# EAGLE board ToastSchematic (EAGLE 9.2.1)
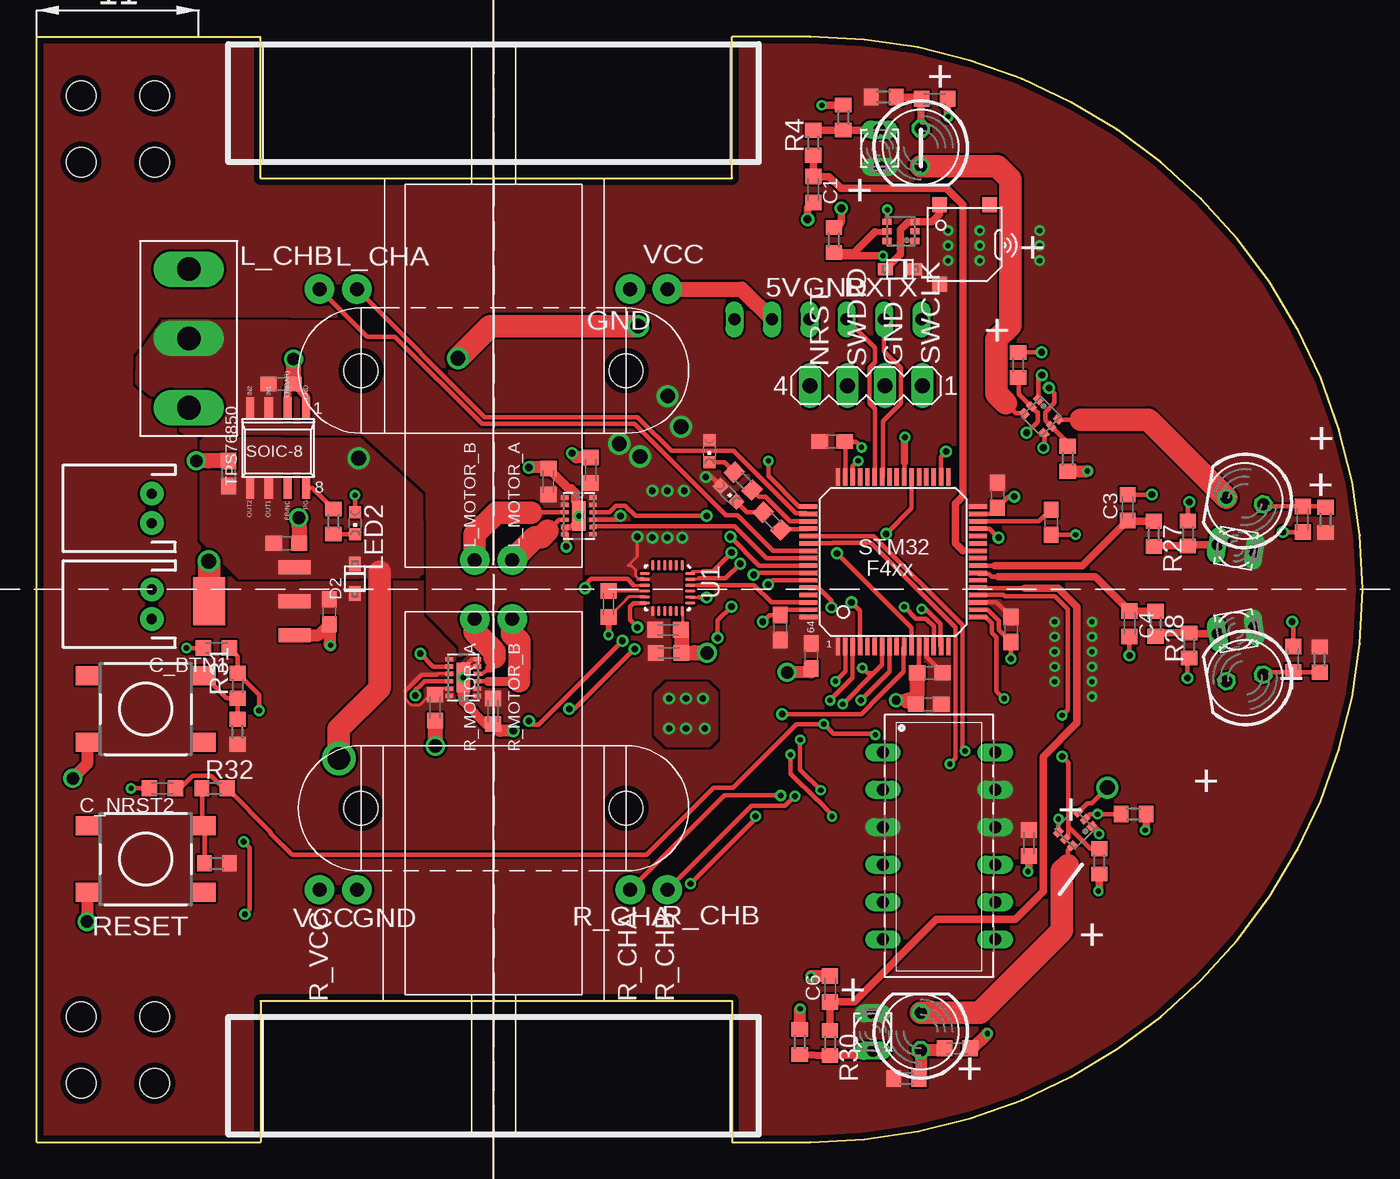
[diagram p0: board, top side]
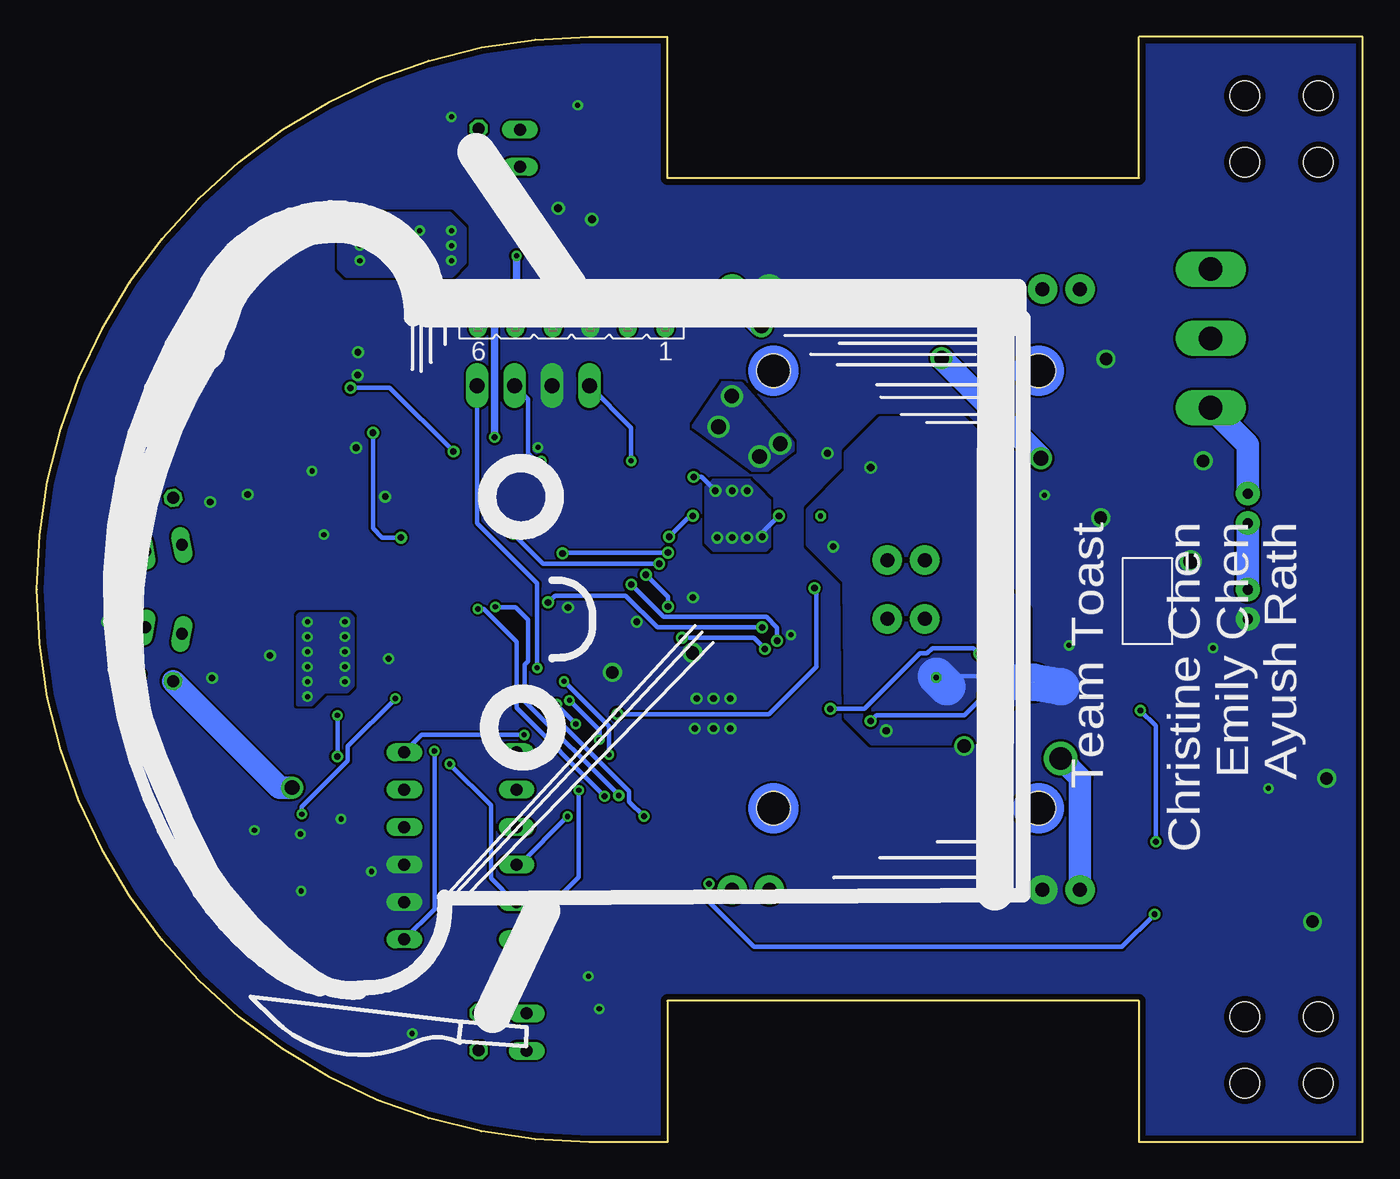
[diagram p1: board, bottom side, seen from below]

Size 90 x 75 mm. Coordinates in mm from the lower left corner, seen from the top.
Outline: 0,0 15.19,0 15.19,9.59 47.19,9.59 47.19,0 52.5,0 arc180 52.5,75 47.19,75 47.19,65.41 15.19,65.41 15.19,75 0,75 0,0
Copper layers (1*16): Top 0.0356mm / dielectric 1.5011mm / Bottom 0.0356mm
Design rules "oshpark-2layer (1)": minimum track width 6mil, minimum drill 13mil, track to track 6mil, track to pad 6mil, pad to pad 6mil, via to via 6mil, smd to smd 6mil, copper to edge 15mil, drill to drill 6mil, minimum pad ring 7mil, minimum via ring 7mil, stop-mask expansion 2.5mil, vias tented up to drill 0mil, thermal gap 10mil
Holes 2 mm at 3,71 8,71 3,66.5 8,66.5 3,8.5 8,8.5 3,4 8,4

## Footprints (pad centres in the part's own frame; a part is rotated, then mirrored left to right if it is on the bottom)
JST-2-PTH = drill 0.7 pad 1.6: 1 -1,0; 2 1,0
C0603K = smd 1.05 x 1.08: 1 -0.875,0; 2 0.875,0
C0603 = smd 1.1 x 1: 1 -0.85,0; 2 0.85,0
SOD-323F = smd 1 x 0.8: A -1,0; C 1,0
LED5MM = drill 0.813 octagon: A -1.27,0; K 1.27,0
CHIPLED_0603 = smd 0.8 x 0.8: A 0,-0.75; C 0,0.75
SOT363 = smd 0.42 x 0.6: 1 -0.65,-0.95; 2 0,-0.95; 3 0.65,-0.95; 4 0.65,0.95; 5 0,0.95; 6 -0.65,0.95
R0603 = smd 1 x 1.1: 1 -0.85,0; 2 0.85,0
DTSM-6 = smd 1.55 x 1.3: 1 -3.975,2.25; 2 3.975,2.25; 3 -3.975,-2.25; 4 3.975,-2.25
SMT-0540-S-R = smd 1 x 1: + 1.7,-2.7; - 1.7,2.7; M -1.7,-2.7
FE06 = drill 0.813 long: 1 -6.35,0; 2 -3.81,0; 3 -1.27,0; 4 1.27,0; 5 3.81,0; 6 6.35,0
MA04-1 = drill 1.016 long: 1 -3.81,0; 2 -1.27,0; 3 1.27,0; 4 3.81,0
BPX81 = drill 0.813 long: C 1.27,0; E -1.27,0
QFN24_3X3MM = smd 0.7 x 0.225: 1 0,0; 2 0,-0.4; 3 0,-0.8; 4 0,-1.2; 5 0,-1.6; 6 0,-2; 13 3.1,-2; 14 3.1,-1.6; 15 3.1,-1.2; 16 3.1,-0.8; 17 3.1,-0.4; 18 3.1,0 | smd 0.225 x 0.7: 7 0.55,-2.55; 8 0.95,-2.55; 9 1.35,-2.55; 10 1.75,-2.55; 11 2.15,-2.55; 12 2.55,-2.55; 19 2.55,0.55; 20 2.15,0.55; 21 1.75,0.55; 22 1.35,0.55; 23 0.95,0.55; 24 0.55,0.55
DSS12_P9X2 = smd 0.5 x 0.28: 1 -0.959,1.25; 2 -0.959,0.75; 3 -0.959,0.25; 4 -0.959,-0.25; 5 -0.959,-0.75; 6 -0.959,-1.25; 7 0.959,-1.25; 8 0.959,-0.75; 9 0.959,-0.25; 10 0.959,0.25; 11 0.959,0.75; 12 0.959,1.25 | smd 0.9 x 2: 13 0,0 | drill 0.35 pad 0.406 octagon: V_1 0,0
STM32F411/446_LQFP64 = smd 1.2 x 0.3: BOOT0 -5.75,-1.75; PA3 5.75,-3.75; PA4 5.75,-2.25; PA5 5.75,-1.75; PA6 5.75,-1.25; PA7 5.75,-0.75; PA14 -5.75,3.75; PA15 -5.75,3.25; PB0 5.75,0.75; PB1 5.75,1.25; PB2 5.75,1.75; PB3 -5.75,0.75; PB4 -5.75,0.25; PB5 -5.75,-0.25; PB6 -5.75,-0.75; PB7 -5.75,-1.25; PB8 -5.75,-2.25; PB9 -5.75,-2.75; PB10 5.75,2.25; PC4 5.75,-0.25; PC5 5.75,0.25; PC10 -5.75,2.75; PC11 -5.75,2.25; PC12 -5.75,1.75; PD2 -5.75,1.25; VCAP_1 5.75,2.75; VDD_0 5.75,-2.75; VDD_1 5.75,3.75; VDD_3 -5.75,-3.75; VSS_0 5.75,-3.25; VSS_1 5.75,3.25; VSS_3 -5.75,-3.25 | smd 0.3 x 1.2: NRST -0.75,-5.75; PA0_WKUP 2.75,-5.75; PA1 3.25,-5.75; PA2 3.75,-5.75; PA8 -0.25,5.75; PA9 -0.75,5.75; PA10 -1.25,5.75; PA11 -1.75,5.75; PA12 -2.25,5.75; PA13 -2.75,5.75; PB12 3.75,5.75; PB13 3.25,5.75; PB14 2.75,5.75; PB15 2.25,5.75; PC0 -0.25,-5.75; PC1 0.25,-5.75; PC2 0.75,-5.75; PC3 1.25,-5.75; PC6 1.75,5.75; PC7 1.25,5.75; PC8 0.75,5.75; PC9 0.25,5.75; PC13 -3.25,-5.75; PC14 -2.75,-5.75; PC15 -2.25,-5.75; PH0 -1.75,-5.75; PH1 -1.25,-5.75; VBAT -3.75,-5.75; VDD_2 -3.75,5.75; VDDA 2.25,-5.75; VSS_2 -3.25,5.75; VSSA 1.75,-5.75
GH39P0 = drill 1.6 long: P$1 0,-4.7; P$2 0,0; P$3 0,4.7
TPS76850(SOIC-8) = smd 0.55 x 1.5: EN(BAR) -0.635,-2.7; FB/NC -0.635,2.7; GND -1.905,-2.7; IN1 0.635,-2.7; IN2 1.905,-2.7; OUT1 0.635,2.7; OUT2 1.905,2.7; PG -1.905,2.7
FUTURA_V1.0_MOTOT_MOUNT = drill 0.95 pad 2: L_CHA -20.375,26.73; L_CHB -20.375,24.19; L_GND -20.375,45.27; L_MOTOR_A -2,37.27; L_MOTOR_B -2,34.73; L_VCC -20.375,47.81; R_CHA 20.375,45.27; R_CHB 20.375,47.81; R_GND 20.375,26.73; R_MOTOR_A 2,34.73; R_MOTOR_B 2,37.27; R_VCC 20.375,24.19 | hole 2.286: 14.85,45; 14.85,27; -14.85,27; -14.85,45
HCMS390X = drill 0.813 long: 1 -6.35,-3.81; 2 -3.81,-3.81; 3 -1.27,-3.81; 4 1.27,-3.81; 5 3.81,-3.81; 6 6.35,-3.81; 7 6.35,3.81; 8 3.81,3.81; 9 1.27,3.81; 10 -1.27,3.81; 11 -3.81,3.81; 12 -6.35,3.81
SOT-223 = smd 0.95 x 2.15: 1 -2.3,-2.9; 2 0,-2.9; 3 2.3,-2.9 | smd 3.25 x 2.15: 4 0,2.9
SPLITTER = smd 0.102 x 0.102: 1 0,0; 2 0,0

## Placement (x,y rotation side)
BAT1  [JST-2-PTH]  7.8,36.5 90 top
BAT2  [JST-2-PTH]  7.8,43 90 top
C1  1.5nF  [C0603K]  52.7,64.64 270 top
C3  1.5nF  [C0603K]  74.04,43.05 90 top
C4  1.5nF  [C0603K]  74.17,35.18 270 top
C6  1.5nF  [C0603K]  53.85,10.39 90 top
C13  .15uF  [C0603K]  60.94,70.79 0 top
C15  .15uF  [C0603K]  85.92,42.26 270 top
C16  .15uF  [C0603K]  85.28,32.77 90 top
C18  .15uF  [C0603K]  62.5,6.36 0 top
C_BTN1  .1nF  [C0603K]  12.19,33.53 180 top
C_DISP  100nF  [C0603K]  67.34,20.3 270 top
C_IMU  100nF  [C0603K]  38.81,36.51 270 top
C_IMU2  100nF  [C0603K]  42.85,34.75 0 top
C_IMU3  10nF  [C0603K]  42.88,33.19 0 top
C_M  100nF  [C0603K]  37.59,45.59 90 top
C_M1  100nF  [C0603K]  34.73,44.83 90 top
C_M2  100nF  [C0603K]  27.03,29.48 270 top
C_M3  100nF  [C0603K]  30.97,29.24 270 top
C_NRST2  .1nF  [C0603K]  8.53,24 180 top
C_VBAT  4.7uF  [C0603]  52.56,32.98 270 top
C_VCAP  2.2uF  [C0603]  68.85,42.06 270 top
C_VDD0  .1uF  [C0603]  66.13,34.79 270 top
C_VDD1  .1uF  [C0603]  65.21,43.9 270 top
C_VDD2  .1uF  [C0603]  53.99,47.53 0 top
C_VDD3  .1uF  [C0603]  50.46,34.91 90 top
C_VDD4  .1uF  [C0603]  16.58,51.45 0 top
C_VDD5  10uF  [C0603]  13.03,45.37 90 top
C_VDD6  10uF  [C0603]  19.86,35.98 270 top
C_VDD7  .1uF  [C0603]  16.95,40.63 0 top
C_VDDA  .1uF  [C0603]  60.53,29.71 180 top
C_VDDA1  4.7uF  [C0603]  60.61,31.85 180 top
D1  [SOD-323F]  58.6,59.23 0 top
D2  [SOD-323F]  21.59,38.23 90 top
LED1  [LED5MM]  60,67.5 270 top
LED2  [CHIPLED_0603]  21.6,42 180 top
LED3  [LED5MM]  82,43.5 170 top
LED4  [LED5MM]  82,31.5 190 top
LED6  [LED5MM]  60,7.5 90 top
LED8  [CHIPLED_0603]  45.66,46.88 180 top
LED9  [CHIPLED_0603]  46.95,43.99 225 top
Q1  DMN63D8LDW  [SOT363]  68.19,49.24 225 top
Q3  DMN63D8LDW  [SOT363]  70.48,21.24 135 top
Q4  DMN63D8LDW  [SOT363]  58.66,61.8 90 top
R1  [R0603]  20.14,42.11 270 top
R2  [R0603]  49.91,42.14 135 top
R3  [R0603]  47.94,44.85 135 top
R4  210k  [R0603]  52.7,67.82 90 top
R5  18  [R0603]  57.49,70.92 180 top
R7  18  [R0603]  87.48,42.22 270 top
R8  18  [R0603]  87.08,32.74 90 top
R10  18  [R0603]  59.02,4.31 180 top
R11  1.8k  [R0603]  78.21,33.7 90 top
R13  1.8k  [R0603]  51.79,6.79 270 top
R14  1.8k  [R0603]  78.14,41.3 270 top
R16  1.8k  [R0603]  54.74,69.52 270 top
R17  10k  [R0603]  54.1,61.21 90 top
R18  10k  [R0603]  12.23,18.92 180 top
R19  10k  [R0603]  13.63,27.85 90 top
R20  10k  [R0603]  72.12,19.05 270 top
R22  10k  [R0603]  74.45,22.26 0 top
R23  10k  [R0603]  66.61,52.73 90 top
R25  10k  [R0603]  69.98,46.38 270 top
R27  210k  [R0603]  75.82,41.27 270 top
R28  210k  [R0603]  75.95,35.18 270 top
R30  210k  [R0603]  53.85,6.73 270 top
R31  100k  [R0603]  13.64,30.96 90 top
R32  100k  [R0603]  12.06,24 0 top
S1  DTSM-6  [DTSM-6]  7.39,29.39 180 top
S2  DTSM-6  [DTSM-6]  7.39,19.21 180 top
SPK1  SMT-0540-S-R  [SMT-0540-S-R]  62.98,60.91 180 top
SV2  [FE06]  53.7,55.83 180 bottom
SWD  [MA04-1]  56.3,51.33 180 top
T1  BPX81  [BPX81]  57.21,67.44 270 top
T3  BPX81  [BPX81]  81.4,40.3 350 top
T4  BPX81  [BPX81]  81.4,34.7 10 top
T6  BPX81  [BPX81]  56.75,7.46 90 top
U1  MPU6500MPU6500_QFN24_3X3MM  [QFN24_3X3MM]  43.81,39.14 270 top
U3  DRV8839_DSS_12  [DSS12_P9X2]  28.95,31.52 180 top
U4  DRV8839_DSS_12  [DSS12_P9X2]  36.8,42.49 0 top
U$1  STM32F411/446_LQFP64  [STM32F411/446_LQFP64]  58.13,39.37 0 top
U$2  GH39P0  [GH39P0]  10.31,54.53 0 top
U$3  TPS76850(SOIC-8)  [TPS76850(SOIC-8)]  16.39,47.1 180 top
U$4  FUTURA_V1.0_MOTOR_MOUNT  [FUTURA_V1.0_MOTOT_MOUNT]  -5,37.5 270 top
U$6  HCMS390X  [HCMS390X]  61.24,20.1 270 top
U$7  TLV1117  [SOT-223]  14.61,36.7 90 top
U$9  SPLITTER  [SPLITTER]  22.33,31.19 90 bottom

## Library data of the parts
BAT1 BAT2 = SparkFun-Connectors; PROD_ID: CONN-09863; SKU: PRT-09914
C1 C3 C4 C6 C13 C15 C16 C18 C_BTN1 C_DISP C_IMU C_IMU2 C_IMU3 C_M C_M1-C_M3 C_NRST2 C_VBAT C_VCAP C_VDD0 C_VDD1-C_VDD7 C_VDDA C_VDDA1 = rcl; SPICEPREFIX: C
D1 D2 = adafruit
LED1-LED4 LED6 LED8 LED9 = led
Q1 Q3 Q4 = DMN63D8LDW
R1 R4 R5 R7 R8 R10 R11 R13 R14 R16-R20 R22 R23 R25 R27 R28 R30-R32 = rcl; SPICEPREFIX: R
R2 R3 = resistor
S1 S2 = switch-tact
SPK1 = SMT-0540-S-R; AVAILABILITY: Good; DESCRIPTION: Audio Indicator Transducer Electromagnetic 3Vp-p 100mA Solder Pad 2Vp-p 3500Hz to 4500Hz Surface Mount; MF: PUI Audio; MP: SMT-0540-S-R; PACKAGE: None; PRICE: 2.43 USD
SV2 = con-lsta; OC_FARNELL: unknown; OC_NEWARK: unknown
SWD = con-lstb; OC_FARNELL: unknown; OC_NEWARK: unknown
T1 T3 T4 T6 = opto-trans-siemens; OC_FARNELL: unknown; OC_NEWARK: unknown
U1 = Mouse; CASE/PACKAGE: QFN; COMPONENTLINK1DESCRIPTION: https://datasheet.ciiva.com/29175/mpu-6500-spec-29175093.pdf; COMPONENTLINK1URL: https://datasheet.ciiva.com/29175/mpu-6500-spec-29175093.pdf; MANUFACTURER: TDK InvenSense; MANUFACTURER_PART_NUMBER: MPU-6500; MAX_OPERATING_TEMPERATURE: 85�C; MIN_OPERATING_TEMPERATURE: -40�C; MOUNT: Surface Mount; NUMBER_OF_PINS: 24; OPERATING_SUPPLY_VOLTAGE: 3.45V; OUTPUT_TYPE: Digital; PACKAGE_QUANTITY: 5000; SENSOR_TYPE: Accelerometer,Gyroscope; STOCK_1: 0; SUPPLIER_1: Mouser; SUPPLIER_PART_NUMBER_1: 410-MPU-6500
U3 U4 = DRV8839; MANUFACTURER_PART_NUMBER: drv8839_dss_12; VENDOR: Texas Instruments
U$1 = STM32F10x F4xx
U$2 U$7 = Mouse
U$3 = TPS76850SOIC-8
U$4 = Futura 1.0 motor mount template
U$6 = display-hp
U$9 = splitter

## Nets
+3V3: C_DISP.1 C_IMU2.1 C_IMU3.1 C_M2.1 C_M.1 C_VBAT.1 C_VDD0.1 C_VDD1.1 C_VDD2.1 C_VDD3.1 C_VDD6.1 C_VDDA1.1 C_VDDA.1 D1.C D2.A LED8.A LED9.A R5.2 R7.2 R8.2 R10.2 R18.1 R19.1 SPK1.- T1.C T3.C T4.C T6.C U1.8 U1.13 U3.7 U3.9 U3.11 U3.12 U4.7 U4.9 U4.11 U4.12 U$1.VBAT U$1.VDD_0 U$1.VDD_1 U$1.VDD_2 U$1.VDD_3 U$1.VDDA U$6.3 U$6.10 U$6.11 U$7.2
+5V: C_VDD5.1 C_VDD7.1 D2.C SV2.2 U$3.OUT1 U$3.OUT2 U$4.L_VCC U$4.R_VCC U$7.3
BTN1: C_BTN1.1 R31.2 U$1.PC0
BUZZER: Q4.5 R17.1 U$1.PC8
CS: U1.22 U$1.PB9
DISP_CE: U$1.PC12 U$6.7
DISP_CLK: U$1.PC14 U$6.6
DISP_IN: U$1.PC13 U$6.4
DISP_RS: U$1.PD2 U$6.5
GND: BAT1.1 C1.2 C3.2 C4.2 C6.2 C13.2 C15.2 C16.2 C18.2 C_BTN1.2 C_DISP.2 C_IMU2.2 C_IMU3.2 C_IMU.2 C_M2.2 C_M.2 C_NRST2.2 C_VBAT.2 C_VCAP.2 C_VDD0.2 C_VDD1.2 C_VDD2.2 C_VDD3.2 C_VDD4.2 C_VDD5.2 C_VDD6.2 C_VDD7.2 C_VDDA1.2 C_VDDA.2 LED2.A Q1.1 Q1.4 Q3.1 Q3.4 Q4.4 R11.1 R13.1 R14.1 R16.1 R17.2 R20.2 R22.2 R23.2 R25.2 S1.2 S2.2 SV2.3 SWD.3 U1.11 U1.18 U1.20 U$1.BOOT0 U$1.VSS_0 U$1.VSS_1 U$1.VSS_2 U$1.VSS_3 U$1.VSSA U$3.EN(BAR) U$3.GND U$4.L_GND U$4.R_GND U$6.8 U$6.9 U$7.1 U$7.4 U$9.1
INT: U1.12 U$1.PC15
IR_FL: Q1.2 R23.1 U$1.PB10
IR_FR: Q3.5 R20.1 U$1.PA4
IR_L: Q1.5 R25.1 U$1.PB13
IR_R: Q3.2 R22.1 U$1.PA3
L_ENC_A: U$1.PA15 U$4.L_CHA
L_ENC_B: U$1.PB3 U$4.L_CHB
LED1: R3.1 U$1.PC10
LED2: R2.1 U$1.PC11
M_L_B: U4.10 U$1.PB5
M_L_F: U4.8 U$1.PB4
M_R_B: U3.8 U$1.PB6
M_R_F: U3.10 U$1.PB7
MGND: C_M1.2 C_M3.2 U3.5 U3.6 U3.13 U4.5 U4.6 U4.13 U$9.2
MISO: U1.9 U$1.PC2
MOSI: U1.24 U$1.PC3
MOTOR_LEFT_1: U4.3 U$4.L_MOTOR_B
MOTOR_LEFT_2: U4.4 U$4.L_MOTOR_A
MOTOR_RIGHT_1: U3.3 U$4.R_MOTOR_B
MOTOR_RIGHT_2: U3.4 U$4.R_MOTOR_A
N$1: BAT1.2 BAT2.1
N$2: BAT2.2 U$2.P$1
N$5: C_VCAP.1 U$1.VCAP_1
N$6: LED8.C R3.2
N$8: C13.1 LED1.A R5.1
N$9: LED1.K Q1.3
N$10: R19.2 R31.1 S1.3
N$11: LED2.C R1.2
N$12: LED3.K Q1.6
N$13: R18.2 R32.1 S2.3
N$14: C18.1 LED6.A R10.1
N$15: LED6.K Q3.6
N$16: C16.1 LED4.A R8.1
N$17: C_IMU.1 U1.10
N$18: LED4.K Q3.3
N$22: R1.1 U$3.PG
N$23: D1.A Q4.3 SPK1.+
N$24: R4.2 R16.2 T1.E
N$25: LED9.C R2.2
N$27: R14.2 R27.2 T3.E
N$28: R11.2 R28.2 T4.E
N$32: R13.2 R30.2 T6.E
N$33: C15.1 LED3.A R7.1
NRST: C_NRST2.1 R32.2 SWD.1 U$1.NRST U$6.12
R_ENC_A: U$1.PA0_WKUP U$4.R_CHA
R_ENC_B: U$1.PA1 U$4.R_CHB
REC_FL: C3.1 R27.1 U$1.PC4
REC_FR: C4.1 R28.1 U$1.PA7
REC_L: C1.1 R4.1 U$1.PB0
REC_R: C6.1 R30.1 U$1.PA5
RX: SV2.4 U$1.PA10
SCK: U1.23 U$1.PC7
SWCLK: SWD.4 U$1.PA14
SWDIO: SWD.2 U$1.PA13
TX: SV2.5 U$1.PA9
V_BATT: C_M1.1 C_M3.1 C_VDD4.1 U3.1 U3.2 U4.1 U4.2 U$2.P$2 U$3.IN1 U$3.IN2

## Tracks (layer width: path | path; a pad name or v marks a point on that pad's centre or on a via)
+3V3  (via drill 0.35, 0.45, 1)
  Top 0.203: U1.8 41.23,38.23 40.84,38.23 40.66,38.41 40.66,38.8 40.34,39.12 40.13,39.12 40.77,39.75 v40.77,41.08 | U3.9 27.19,31.77 27.14,31.72 | 25.03,30.65 25.15,30.77 25.15,30.7 25.04,30.58 25.04,30.04 25.42,29.65 25.97,29.65 27.09,30.77 U3.11
  Top 0.305: U$1.VDD_0 65.14,36.62 C_VDD0.1 | 27.14,31.72 26.32,31.72 26.13,31.72 25.16,30.78 25.03,30.65 | U4.9 38.58,42.24 39.37,42.24 v39.62,42.49 | U$1.VDDA 60.38,32.98 60.43,32.94 60.43,32.9 C_VDDA1.1 | LED9.A 45.8,45.14 v45.41,45.14
  Bottom 0.305: v39.62,42.49 40.77,41.35 v40.77,41.08 | v45.41,45.14 44.88,45.14 v43.94,44.2
  other vias: 39.54,47.38 42.82,50.62 40.95,46.52 43.73,48.54 41.78,44.2 42.8,44.2 43.81,41.02 42.8,41.02 41.78,41.02 61.85,60.83 61.85,61.85 61.85,59.82 64.01,61.85 64.01,60.83 64.01,59.82 69.09,35.31 69.09,34.29 69.09,33.27 71.63,32.26 71.63,31.24 71.63,30.23 69.09,32.26 69.09,31.24 71.63,35.31 71.63,34.29 71.63,33.27 68.07,61.85 68.07,60.83 68.07,59.82
  pour Top (rank 5, no thermals): 0.12,74.75 14.82,74.75 14.82,65.04 47.46,65.04 47.46,75.08 52.75,74.62 arc-90 89.88,37.5 arc-92 47.44,-3.7 47.44,9.84 14.94,9.84 14.94,0.12 0.12,0.12
  pour Bottom: 38.7,47.45 38.72,46.94 40.42,45.61 41.37,45.6 45.43,48.56 43.42,51.54 42.22,51.46 38.73,47.48
  pour Bottom: 40.26,41.15 40.26,40.39 40.51,40.13 44.07,40.13 44.58,40.64 44.58,44.45 44.07,44.96 43.31,44.96 41.66,44.96 41.02,44.32 40.26,43.56
  pour Bottom: 69.47,62.99 61.98,62.99 60.96,61.98 60.96,59.69 61.85,58.8 68.96,58.8 69.47,59.31
  pour Bottom: 72.14,35.81 68.83,35.81 68.58,35.56 68.58,30.99 68.96,30.61 70.36,30.61 70.48,30.61 71.37,29.72 72.26,29.72 72.26,35.69
+5V  (via drill 1, 1.52)
  Top 1.016: U$4.L_VCC 47.84,57.88 SV2.2
  Top 1.524: v28.59,53.2 30.77,55.37 v40.82,55.37 | v20.5,26.04 20.5,28.04 23.27,30.81 23.27,38.71
  Bottom 1.524: v21.84,46.41 21.84,46.43 v28.59,53.2 | U$4.L_VCC 42.81,57.37 v40.82,55.37 | v20.5,26.04 19.19,24.73 U$4.R_VCC
  pour Top (rank 4, no thermals): 11.12,47.5 11.12,40.88 13.75,38.25 25.9,38.36 26.3,38.7 26.3,46.42 26.11,46.61 24.9,47.82 11.38,47.75
BTN1  (via drill 0.4)
  Top 0.305: U$1.PC0 57.88,31.92 v55.93,29.97 | v48.79,22.1 48.79,21.95 v44.37,17.53 | v14.12,15.47 14.45,15.8 14.45,19.99 v14.05,20.39 | C_BTN1.1 13.64,32.95 R31.2 15.09,30.36 v15.09,29.29
  Bottom 0.305: v48.79,22.1 49.79,23.1 49.79,23.81 v55.93,29.96 v55.93,29.97 | v44.37,17.53 44.37,16.3 41.31,13.24 16.35,13.24 v14.12,15.47 | v14.05,20.39 14.05,28.25 v15.09,29.29
BUZZER  (via drill 0.35, 0.4)
  Top 0.305: 58.9,46.13 58.88,45.95 U$1.PC8
  Top 0.406: 56.88,61.77 57.67,61.77 57.68,61.77
  Top 0.508: v58.93,47.83 58.9,47.8 58.9,46.13 | 57.68,61.77 Q4.5 | v57.43,60.14 54.33,60.14 R17.1 55.48,60.36 56.88,61.77
  Bottom 0.508: v58.93,47.83 58.93,56.62 57.43,58.11 v57.43,60.14
CS
  Top 0.203: 44.83,37.79 U1.22
  Top 0.305: U$1.PB9 49.86,36.62 48.7,37.79 44.83,37.79
DISP_CE  (via drill 0.35)
  Top 0.305: U$1.PC12 56.8,41.12 62.81,35.11 62.81,26.74 v63.02,26.54
  Bottom 0.305: U$6.7 63.02,15.79 v63.02,26.54
DISP_CLK  (via drill 0.35)
  Top 0.305: U$1.PC14 55.38,31.5 v53.85,29.97 | v51.82,27.3 51.82,25.27 v53.21,23.88
  Bottom 0.305: v53.85,29.97 51.82,27.94 v51.82,27.3 | v53.21,23.88 53.21,17.97 U$6.6
DISP_IN  (via drill 0.35)
  Top 0.305: U$1.PC13 54.88,31.93 v54.21,31.26 | v51.16,26.29 51.16,25 52.94,23.22 52.98,23.22 53.98,22.23 v53.98,22.1
  Bottom 0.305: v54.21,31.26 51.16,28.21 v51.16,26.29 | v53.98,22.1 57.24,18.83 U$6.4
DISP_RS  (via drill 0.35)
  Top 0.305: U$1.PD2 53.99,40.62 54.02,40.66 56.62,40.66 62.36,34.92 62.36,26.04 v61.98,25.65
  Bottom 0.305: v61.98,25.65 59.18,22.86 59.18,17.91 57.57,16.29 U$6.5
GND  (via drill 0.35, 0.4, 0.45, 0.55, 0.6, 0.85, 0.9, 1)
  Top 0.203: U1.11 40.17,36.99 40.02,36.84 39.99,36.83 39.98,36.81 C_IMU.2 | U1.18 43.81,34.85 C_IMU2.2 43.75,34.72 | U1.20 44.4,36.96 44.79,36.96 44.96,36.96
  Top 0.305: U$1.VSS_2 54.88,47.49 C_VDD2.2 55.59,47.53 v55.98,47.14 | U$1.VSS_1 64.79,42.62 C_VDD1.2 65.96,43.8 v66.35,43.8 | C_VCAP.2 70.5,41.21 v70.51,41.22 | U$1.VSS_3 arc-90 U$1.VSS_3 50.81,36.12 C_VDD3.2 49.73,35.77 v49.28,35.31 | U$1.VSS_0 64.56,36.12 65.29,35.39 65.29,34.77 C_VDD0.2 66.13,32.8 v66.12,32.79 | U$1.VSSA 59.88,32.23 C_VDDA1.2 | Q1.4 68.4,47.19 v68.33,47.12 | Q1.1 67.97,51.8 v68.22,52.05 | R23.2 v68.19,53.59 v68.2,53.59 | C15.2 84.6,41.38 v84.58,41.4 | R14.1 78.14,43.34 v78.23,43.43 | C3.2 74.06,43.94 v75.69,43.94 | C4.2 v74.17,33.02 | R11.1 78.11,32.75 v78.11,31.5 | C16.2 85.28,35.24 v85.22,35.31 | 44.96,36.96 v45.47,36.96 | C_NRST2.2 v6.4,24 | C_BTN1.2 v10.16,33.53 | Q3.4 v69.35,21.92 | Q4.4 57.71,63.25 v57.73,63.27 | U$1.BOOT0 52.43,37.58 53.11,37.58 53.94,36.75 v53.94,36.28 | LED2.A v21.6,43.9
  Top 0.406: C_IMU.2 v38.81,34.42
  Top 0.508: U$3.EN(BAR) 17.02,51.04 C_VDD4.2 18.29,50.59 U$3.GND | R17.2 arc90 54.61,62.57 v54.61,63.37 | C1.2 52.32,63.39 v52.32,62.61 | R22.2 75.3,21.22 v75.23,21.16 | Q3.1 72.11,20.95 v72.11,20.91 | R20.2 72.12,17.1 v72.06,17.04 | C_DISP.2 67.34,18.42 v67.28,18.36 | R16.1 53.3,70.37 v53.29,70.36 | C13.2 61.81,69.6 v61.85,69.57
  Top 0.61: C_VDDA.2 59.01,29.71 58.66,30.07 | 58.66,30.07 59.68,30.32 59.68,30.19 59.77,30.27 C_VDDA1.2 | 58.66,30.07 v58.33,29.98
  Top 0.813: C_VBAT.2 52.56,31.86 52.53,31.9 v50.93,31.88 | C_M.2 36.61,46.47 v36.33,46.74 | S1.2 3.42,25.67 v2.44,24.69 | S2.2 3.42,14.97 v3.4,14.96 | U$7.1 19.13,34.4 C_VDD6.2 19.86,33.79 v19.94,33.71 | R13.1 51.82,7.66 v51.82,9.04 | C6.2 52.56,11.26 v52.55,11.25 | C18.2 63.51,6.36 v64.52,7.37 | R25.2 71.31,45.53 v71.32,45.54
  Top 1.016: C_VDD7.2 17.8,41.83 v17.78,42.37 | C_VDD5.2 11.68,46.22 v10.82,46.23 | C_VDD4.2 17.43,52.9 v17.42,53.14 | C_VDDA1.2 59.72,29.75 C_VDDA.2 | v27.05,26.88 27.03,26.93 C_M2.2 | v45.49,33.2 44.61,33.21 C_IMU3.2 43.75,34.72
  Top 1.524: U$7.4 11.71,39.37 v11.66,39.42
  Bottom 2.54: 20.47,30.89 U$9.1
  other vias: 42.93,30.1 44.07,30.1 45.21,30.1 42.93,28.07 44.07,28.07 45.34,28.07
  pour Bottom (rank 6, no thermals): 0.5,74.62 0.5,-0.06 90.47,-0.06 90.7,74.62
  pour Top: 42.04,30.35 42.04,27.69 42.8,26.92 45.59,26.92 46.1,27.43 46.1,30.48 45.47,31.11 42.8,31.11
INT  (via drill 0.45)
  Top 0.203: U1.12 41.27,36.57
  Top 0.305: U$1.PC15 55.88,36.04 v55.3,36.63 | v40.77,34.92 40.26,35.43 40.26,36.32 40.51,36.57 41.27,36.57
  Bottom 0.305: v55.3,36.63 54.84,37.08 50.04,37.08 47.88,34.92 v40.77,34.92
IR_FL  (via drill 0.45)
  Top 0.305: U$1.PB10 64.67,41.62 v65.28,41.02 | v67.18,48.13 67.94,48.9 67.94,49.53 67.9,49.53 Q1.2 66.67,50.75 66.67,51.82 R23.1
  Bottom 0.305: v65.28,41.02 66.55,41.02 67.18,41.66 v67.18,48.13
IR_FR  (via drill 0.35, 0.45)
  Top 0.305: Q3.5 69.84,20.57 70.01,20.74 70.01,21.4 | v69.6,26.16 70.01,25.75 70.01,21.4 | v69.6,28.96 69.98,29.34 69.98,36.17 69.11,37.03 65.71,37.03 65.61,37.13 63.89,37.13 U$1.PA4 | R20.1 71.51,19.9 70.01,21.4
  Bottom 0.305: v69.6,26.16 v69.6,28.96
IR_L  (via drill 0.45)
  Top 0.305: U$1.PB13 61.38,46.52 v61.72,46.86 | v68.71,51.18 69.09,50.8 69.09,50.16 68.45,49.53 68.45,48.98 Q1.5 69.98,47.45 R25.1
  Bottom 0.305: v61.72,46.86 66.04,51.18 v68.71,51.18
IR_R  (via drill 0.35)
  Top 0.305: R22.1 v72.01,22.26 71.5,22.26 Q3.2 | U$1.PA3 64.42,35.62 64.84,35.2 64.84,34.58 65.15,34.27 65.15,30.61 v65.66,30.1
  Bottom 0.305: v72.01,22.26 72.01,22.75 68.89,25.87 68.89,26.87 v65.66,30.1
L_ENC_A
  Top 0.305: U$1.PA15 52.27,42.62 52.22,42.67 51.53,42.67 47.29,46.91 45.47,46.91 43.07,46.91 41.05,48.93 40.78,49.2 30.41,49.2 U$4.L_CHA
L_ENC_B
  Top 0.305: U$4.L_CHB 22.4,54.66 24.3,54.66 30.22,48.74 40.59,48.74 46.79,42.55 47.55,42.55 49.97,40.12 U$1.PB3
LED1
  Top 0.305: U$1.PC10 51.13,42.12 49.47,43.79 49.01,43.79 R3.1
LED2
  Top 0.305: R2.1 50.55,41.58 52.34,41.58 U$1.PC11
M_L_B  (via drill 0.45)
  Top 0.305: U$1.PB5 49.03,39.12 v47.08,41.08 | U4.10 38.87,42.74 39.33,43.2 39.92,43.2 40.62,42.49 v45.47,42.49
  Bottom 0.305: v47.08,41.08 45.66,42.49 v45.47,42.49
M_L_F
  Top 0.305: U$1.PB4 49.53,39.62 47.37,41.78 38.77,41.78 37.8,41.78 U4.8
M_R_B  (via drill 0.45)
  Top 0.203: v36.13,29.4 36.3,29.4
  Top 0.305: U$1.PB6 48.78,38.62 v48.65,38.5 | v47.15,36.34 46.21,35.4 v46.21,34.22 | v40.58,33.46 36.51,29.4 36.3,29.4 | v26.04,33.15 26.91,32.27 U3.8
  Bottom 0.305: v48.65,38.5 47.15,37 v47.15,36.34 | v46.21,34.22 41.33,34.22 v40.58,33.46 | v36.13,29.4 33.83,29.4 30.06,33.17 29.57,33.17 29.21,33.53 26.42,33.53 v26.04,33.15
M_R_F  (via drill 0.45)
  Top 0.305: U$1.PB7 49.94,38.12 v49.65,37.84 | v39.75,34.02 34.05,28.32 33.66,28.32 v33.4,28.57 | v25.7,30.31 25.7,30.65 26.07,31.02 26.32,31.26 26.41,31.26 26.42,31.26 27.32,31.26 27.33,31.26 U3.10
  Bottom 0.305: v49.65,37.84 47.44,35.63 40.47,35.63 39.76,34.92 v39.76,34.02 v39.75,34.02 | v33.4,28.57 33.02,28.96 27.05,28.96 v25.7,30.31
MGND  (via drill 0.45, 0.5)
  Top 0.305: U4.5 36.04,41.73 | U4.6 U4.5 | U4.5 | U3.6 U3.5 29.87,32.23 29.55,32.23 29.5,32.18 28.95,32.18 29.55,32.77 U3.6
  Top 0.406: 35.84,41.53 36.04,41.73 36.22,41.73 36.27,41.78 36.8,41.78 U4.13 | U4.6 35.94,41.24 v35.94,40.41
  Top 0.61: C_M1.2 36.09,44.34 36.28,44.34 36.55,44.07 36.55,43.55 36.8,43.3 U4.13 | 28.95,30.39 28.95,29.88 30.54,28.29 31.05,28.29
  Top 0.813: 28.95,30.39 U3.13 28.95,32.18 | C_M1.2 34.65,45.78 v33.39,45.78 | C_M3.2 31.05,28.29 31.43,27.91 v32.34,27.91
  Bottom 0.305: 23.22,31.19 23.62,31.6 28.93,31.6
  Bottom 2.54: 28.93,31.6 28.22,30.89 | U$9.2 23.22,31.19
  pour Bottom: 26.29,27.05 33.3,27.05 35.08,28.83 35.18,38.05 37.67,40.54 37.67,42.93 35.08,45.52 35.08,46.79 32.74,49.12 27.1,49.12 25.6,47.62 25.45,38.86 22.68,36.09 22.68,30.68 25.6,27.76 25.6,27.74
  pour Top (no thermals): 28.9,32.5 29.3,32.9 30,32.9 30,32.2 29.2,32.2
MISO  (via drill 0.45)
  Top 0.203: 40.5,37.79 U1.9
  Top 0.305: U$1.PC2 58.84,33.58 58.84,31.91 57.21,30.29 55.97,29.04 v50.59,29.04 | v37.21,37.59 37.21,37.79 37.63,38.21 40.08,38.21 40.5,37.79
  Bottom 0.305: v50.59,29.04 40.3,29.04 37.08,32.26 37.08,37.47 v37.21,37.59
MOSI  (via drill 0.45)
  Top 0.203: U1.24 44.51,38.73 45.21,38.73
  Top 0.305: 45.21,38.73 45.89,38.73 v47.15,40 | U$1.PC3 59.38,34.89 v54.32,39.95
  Bottom 0.305: v54.32,39.95 54.27,40 v47.15,40
MOTOR_LEFT_1
  Top 0.305: 33.55,42.72 33.57,42.74 U4.3
  Top 1.524: U$4.L_MOTOR_B 29.73,41.26 31.19,42.72 33.55,42.72
MOTOR_LEFT_2
  Top 0.305: 34.67,41.47 35.44,42.24 U4.4
  Top 1.524: 34.67,41.47 34.25,41.05 33.82,41.05 U$4.L_MOTOR_A
MOTOR_RIGHT_1
  Top 0.305: U3.3 30.63,31.27 30.64,31.27
  Top 0.61: 30.64,31.27 32.74,31.27
  Top 1.524: U$4.R_MOTOR_B 32.27,34.47 32.75,33.98 32.75,32.2 32.74,32.19 32.74,31.27
MOTOR_RIGHT_2
  Top 0.305: U3.4 30.23,31.77 30.76,32.17
  Top 0.61: 30.76,32.17 30.89,32.35 31.08,32.89
  Top 1.524: 31.08,32.89 31.08,33.29 29.73,34.64 U$4.R_MOTOR_A
N$1
  Bottom 1.524: BAT1.2 BAT2.1
N$2
  Bottom 1.524: BAT2.2 7.8,47.32 U$2.P$1
N$5
  Top 0.305: U$1.VCAP_1 68.01,42.12 C_VCAP.1
N$6
  Top 0.305: LED8.C 46.67,46.13 R3.2
N$8
  Top 0.508: LED1.A 60,70.72 C13.1 60.18,70.91 R5.1
  Top 0.813: R5.1
N$9
  Top 0.305: 65.77,50.15 66.46,49.46 Q1.3
  Top 1.524: LED1.K 65.22,66.23 66.09,65.35 66.09,55.41 65.15,54.46 65.15,50.77 65.77,50.15
N$10
  Top 0.305: R31.1 13.61,30.11 | 13.61,30.11 12.89,30.11 S1.3 | R19.2 13.63,30.09 13.61,30.11
N$11
  Top 0.305: R1.2 LED2.C
N$12
  Top 0.305: Q1.6 70.87,49.02
  Top 1.524: LED3.K 75.45,49.02 70.87,49.02
N$13
  Top 0.305: R32.1 11.21,21.61 S2.3 11.38,21.45 R18.2
N$14
  Top 0.813: C18.1 61.49,6.23 LED6.A 60,4.44 R10.1
N$15
  Top 0.305: 69.98,18.8 69.98,19.82 Q3.6
  Top 1.524: LED6.K 64.02,8.77 69.6,14.35 69.6,18.41 69.98,18.8
N$16
  Top 0.305: R8.1 C16.1 83.42,31.89 LED4.A
N$17
  Top 0.203: U1.10 41.26,37.38 C_IMU.1
N$18  (via drill 1)
  Top 0.305: v72.67,24.05 71.6,22.99 71.3,22.99 Q3.3
  Bottom 1.524: LED4.K 73.52,24.05 v72.67,24.05
N$22
  Top 0.305: R1.1 18.7,44.4 U$3.PG
N$23
  Top 0.508: D1.A 58.33,59.96 58.62,60.25 58.62,61.89 59.14,62.41 59.58,62.41 Q4.3 60.76,62.45 61.28,62.97 SPK1.+
N$24
  Top 0.508: R4.2 R16.2 57.17,68.67 T1.E
N$25
  Top 0.305: LED9.C 48.2,42.74 R2.2
N$27
  Top 0.508: T3.E 78.2,40.52 R14.2 75.84,40.45 R27.2
N$28
  Top 0.508: T4.E 78.29,34.48 R11.2 76.17,34.55 R28.2
N$32
  Top 0.508: T6.E 56.44,5.88 R30.2 53.88,5.84 R13.2
N$33
  Top 0.305: LED3.A 83.4,43.13 C15.1 87.42,43.13 R7.1
NRST  (via drill 0.35)
  Top 0.305: U$1.NRST 57.38,32.39 56.8,31.82 | 56.8,31.82 v54.71,29.72 | v56.92,27.64 56.84,27.71 54.08,27.71 v53.42,28.37 53.39,28.35 51.56,28.35 47.27,24.05 45.95,24.05 41.4,19.51 17.32,19.51 15.89,20.94 15.89,21.03 R32.2 12.7,24 11.84,24.86 10.59,24.86 9.73,24 C_NRST2.1 | 56.8,31.82 56.4,31.82 v56.04,32.18
  Bottom 0.305: v54.71,29.72 54.71,29.66 v53.42,28.37 | v56.92,27.64 63.87,27.64 U$6.12 | v56.04,32.18 56.04,37.75 56.03,37.74 56.03,37.92 60.12,42.01 SWD.1
R_ENC_A  (via drill 0.35, 0.4)
  Top 0.305: v50.49,23.52 46.66,23.52 U$4.R_CHA | U$1.PA0_WKUP 60.88,35 60.36,35.51 59.68,35.51 v58.88,36.32
  Bottom 0.305: v50.49,23.52 56.9,29.92 56.9,32.38 56.64,32.64 56.64,35.44 57.5,36.3 58.84,36.3 58.86,36.32 v58.88,36.32
R_ENC_B  (via drill 0.35, 0.4)
  Top 0.305: v51.45,23.48 50.79,22.81 48.5,22.81 U$4.R_CHB | v60.06,36.18 v60.07,36.17 60.35,36.17 61.34,35.19 61.34,33.67 U$1.PA1
  Bottom 0.305: v51.45,23.48 57.44,29.46 57.44,33.95 59.66,36.18 v60.06,36.18
REC_FL
  Top 0.305: 65.02,39.12 U$1.PC4
  Top 0.508: R27.1 74.09,42.12 C3.1 70.98,39.12 65.02,39.12
REC_FR
  Top 0.305: U$1.PA7 63.93,38.58 64.61,38.58 64.83,38.35 65.28,38.35
  Top 0.508: R28.1 74.19,36.03 C4.1 71.87,38.35 65.28,38.35
REC_L
  Top 0.305: U$1.PB0 62.87,40.12 62.87,40.13
  Top 0.508: 62.87,40.13 62.36,40.64 62.36,43.31 62.87,43.81 62.87,63.6 61.75,64.71 54.59,64.71 53.78,65.52 C1.1 R4.1
REC_R
  Top 0.305: 67.06,37.59 63.91,37.59 U$1.PA5
  Top 0.508: R30.1 C6.1 55.48,9.53 61.07,15.11 66.42,15.11 68.33,17.02 68.33,26.16 70.61,28.45 70.61,36.32 69.34,37.59 67.06,37.59
RX
  Top 0.305: SV2.4 56.88,53.92 56.88,52.91 56.51,52.53 56.51,50.12 56.88,49.75 U$1.PA10
SCK  (via drill 0.45)
  Top 0.203: 44.96,38.25 44.91,38.2 44.66,38.2 44.65,38.19 U1.23
  Top 0.305: U$1.PC7 59.38,43 v57.66,41.27 | v47.75,39.24 46.76,38.25 44.96,38.25
  Bottom 0.305: v57.66,41.27 55.63,39.24 v47.75,39.24
SWCLK  (via drill 0.35)
  Top 0.305: U$1.PA14 51.74,43.12 49.66,45.21 v49.66,46.23
  Bottom 0.305: v49.66,46.23 49.66,48.49 SWD.4
SWDIO  (via drill 0.35)
  Top 0.305: U$1.PA13 55.38,45.86 v55.75,46.23
  Bottom 0.305: v55.75,46.23 56.13,46.23 56.64,46.74 56.64,50.4 SWD.2
TX
  Top 0.305: U$1.PA9 57.43,45.17 57.43,48.91 58.64,50.12 58.64,52.53 57.51,53.66 SV2.5
V_BATT
  pour Top (rank 2, no thermals): 6.83,53.22 6.82,51.54 8.25,50.38 8.35,49.24 10.12,48.11 11.26,48.14 22.22,48.08 26.52,44.18 26.54,40.31 26.54,35.92 28.78,33.68 28.7,30.18 30.43,27.76 32.28,27.66 36.96,27.56 36.9,47.95 36.89,53.37 34.89,55.46 25.5,55.62 8.57,55.7

## Text on the board
tPlace: + | + | L_CHB | L_CHA | VCC | + | 5V | GND | RX | TX | GND | + | NRST | SWDIO | GND | SWCLK | + | + | + | + | + | RESET | VCC | GND | R_CHA | R_CHB | + | + | +
bPlace: Team Toast / / Christine Chen / Emily Chen / Ayush Rath